# Altium PCB Pendulum_Project.PcbDoc
Units mil, origin at the board's own origin, x right, y up, seen from the top; angles counter-clockwise.
Board outline 3175 x 2933.07 mil, 2 copper layers (Top Layer, Bottom Layer); 34 components, 47 nets, 187 pads, 17 vias.
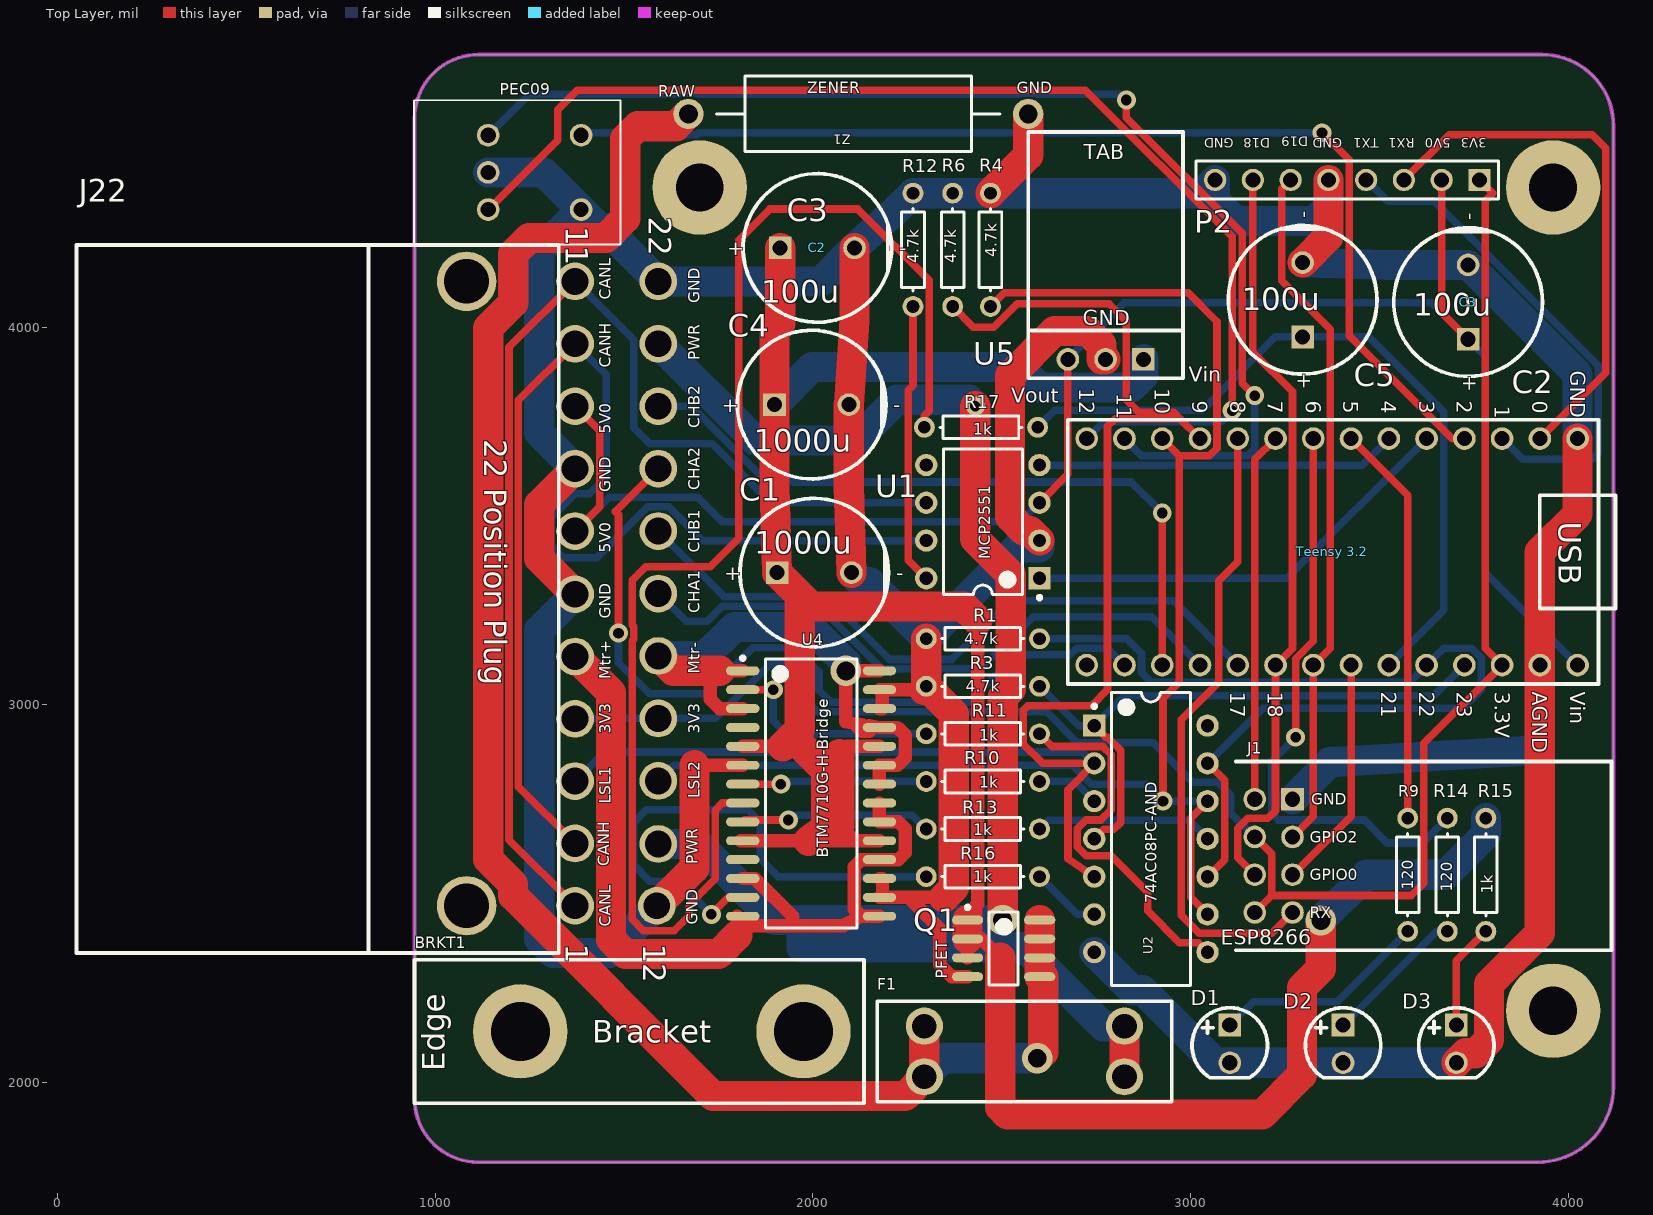
[diagram p0: Top Layer view]
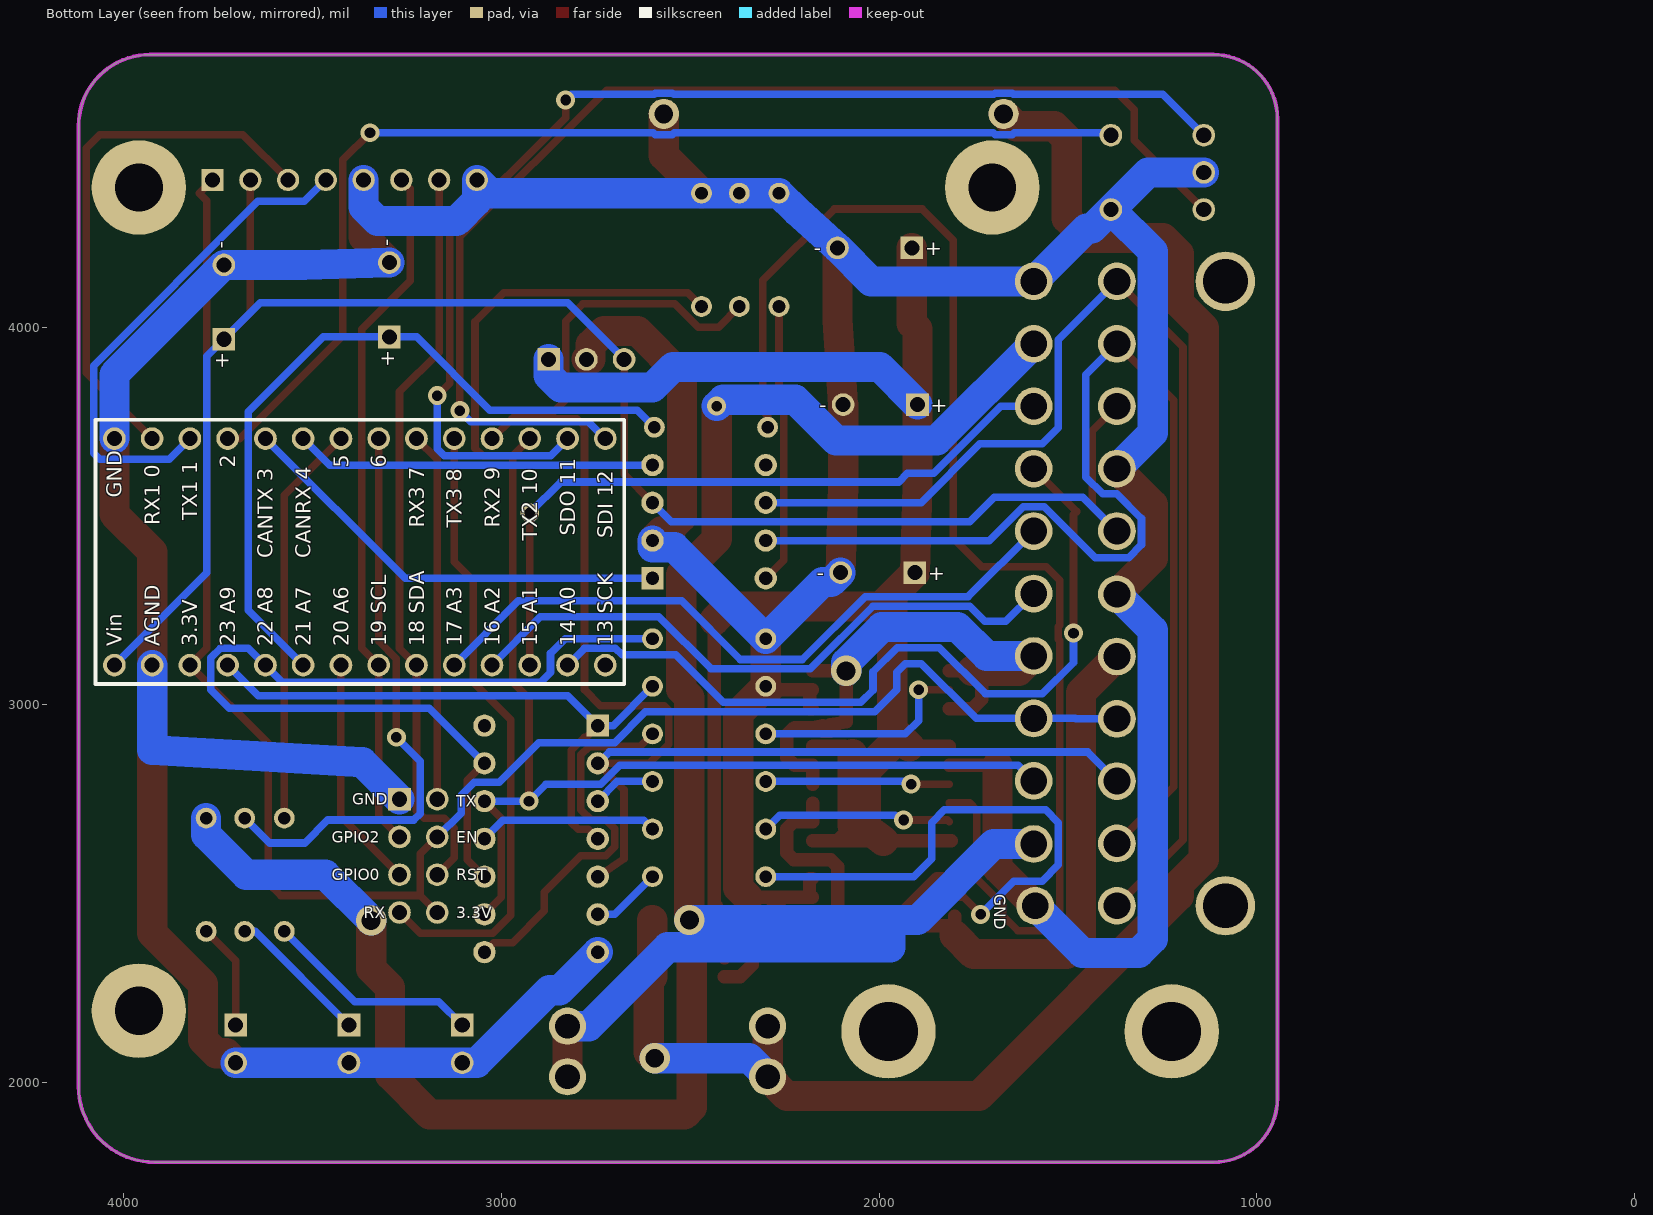
[diagram p1: Bottom Layer view, seen from below]

## Layer stack, top to bottom
Top Solder: solder mask 0.4, Solder Resist, Dk 3.5
Top Layer: signal copper 1.4
Dielectric 1: dielectric 12.6, FR-4, Dk 4.8
Bottom Layer: signal copper 1.4
Bottom Solder: solder mask 0.4, Solder Resist, Dk 3.5

## Board outline
1113.25,1788.78 cw(c1113.25,1957.03) 945,1957.03 945,4552.57 cw(c1114.28,4552.57) 1114.28,4721.85 3931.08,4721.85 cw(c3931.08,4532.93) 4120,4532.93 4120,1989.28 cw(c3919.5,1989.28) 3919.5,1788.78

## Design rules (kind name [scope] priority, off if disabled: settings)
Clearance [All] p1: gap=5
PolygonConnect [All] p1: connectstyle=Relief reliefconductorwidth=10 reliefentries=4 polygonreliefangle="90 Angle" airgapwidth=10
RoutingVias RAW_1 [InNet('RAW') OR InNet('RAW1') OR InNet('VCC24') OR InNet('VCC24') OR InNet('VCC24') OR InNet('MotorPos')  OR InNet('MotorNeg') OR InNet('GND')] p1: holewidth=50 width=80 viastyle="Through Hole" minholewidth=50 minwidth=80 maxholewidth=50 maxwidth=80
RoutingVias [All] p2: holewidth=28 width=50 viastyle="Through Hole" minholewidth=28 minwidth=50 maxholewidth=28 maxwidth=50
SMDNeckDown [All] p1: percent=150.000
SolderMaskExpansion [All] p1: expansion=4
Width RAW [InNet('RAW') OR InNet('VCC24') OR InNet('VCC24') OR InNet('VCC24') OR InNet('MotorPos')  OR InNet('MotorNeg')  OR InNet('GND') OR   InNet('RAW1')] p1: maxlimit=100 minlimit=10 preferedwidth=80 bottomlayer_minwidth=50 minimp=50.000000 maximp=50.000000 favimp=50.000000
Width [All] p2: maxlimit=30 minlimit=10 preferedwidth=20 minimp=50.000000 maximp=50.000000 favimp=50.000000
30 further rules are at their usual default settings.

## Classes and differential pairs
component class Pendulum_Project: D1 D2 J1 J22 P2 PEC09 R9 R12 R14 "Teensy 3.2" U1
component class HBridge_and_Power: BRKT1 C1 C2 C3 C4 C5 D3 F1 Q1 R1 R3 R4 R6 R10 R11 R13 R15 R16 R17 U2 U4 U5 Z1

## Components (designator, comment, footprint, x,y, rotation, side; value= is the part's Value field where it differs from the comment)
BRKT1 "Bracket" "Board Bracket" 1225,2135 r0 top
C1 "Cap Pol1" "Elec. Cap 5 x 10mm" 1905,3350 r0 top
C2 "Cap Pol1" "Elec. Cap 5 x 10mm" 1913.15,4210 r0 top
C3 "Cap Pol1" "Elec. Cap 5 x 10mm" 3735,3968.15 r90 top
C4 "Cap Pol1" "Elec. Cap 5 x 10mm" 1898.15,3795 r0 top
C5 "Cap Pol1" "Elec. Cap 5 x 10mm" 3296.85,3974.15 r90 top
D1 "LED1" "5mm Rad LED" 3105,2100 r0 top
D2 "LED1" "5mm Rad LED" 3405,2100 r0 top
D3 "LED1" "5mm Rad LED" 3705,2100 r0 top
F1 "Blade Fuse Holder" "Fuse Holder" 2825,2149 r180 top
J1 "ESP8266" ESP8266 3170,2750 r0 top
J22 "22 Pos Mini-Fit Jr." "22 pos Mini-Fit Jr. R/A Header" 1370,2467.87 r270 top
P2 "Header 8" HDR1X8 3765,4390 r180 top
PEC09 "PEC09 Quadrature Encoder" "PEC09 Series Encoder" 1140,4410 r180 top (schematic designator SW1)
Q1 "IRF9328" SOIC-8 2505,2355 r0 top
R1 "Res1" AXIAL-0.3 2450,3175 r180 top
R3 "Res1" AXIAL-0.3 2450,3049 r180 top
R4 "Res1" AXIAL-0.3 2470,4205 r270 top
R6 "Res1" AXIAL-0.3 2370,4205 r270 top
R9 "Res1" AXIAL-0.3 3575,2550 r90 top
R10 "Res1" AXIAL-0.3 2450,2797 r0 top
R11 "Res1" AXIAL-0.3 2450,2923 r0 top
R12 "120" AXIAL-0.3 2265,4205 r90 top
R13 "Res1" AXIAL-0.3 2450,2671 r180 top
R14 "Res1" AXIAL-0.3 3680,2550 r90 top
R15 "Res1" AXIAL-0.3 3782.08,2550 r90 top
R16 "Res1" AXIAL-0.3 2450,2545 r0 top
R17 "Res1" AXIAL-0.3 2445,3735 r0 top
"Teensy 3.2" "Teensy 3.2 Outside" "Teensy 3.2 Outside Only" 2725,3705 r270 top
U1 "MCP2551-I/P" PDIP300-P8 2450,3485 r180 top
U2 "74AC08PC" N14A 2895,2645 r0 top
U4 "BTM7710G" INF-PG-DSO-28-22_N 1995,2765 r0 top
U5 "OKI-78SR" OKI-78SR 2675,3915 r0 top
Z1 "SMA6J" AXIAL-0.9 2120,4565 r180 top

## Footprints (in the part's own frame and the unit in brackets; to place one, negate y for a bottom-side part, rotate by r counter-clockwise, add the part's x,y. Pads: shape width x height; smd on the part's side, far side on the other; paste and mask are expansions set on the pad)
"5mm Rad LED" [mil]
  rect 60x60 hole 40: 1(-1.11,52.06)
  round 60 hole 40: 2(-1.11,-47.94)
  silkscreen extent -101,-88 99,98
"22 pos Mini-Fit Jr. R/A Header" [mm] "Molex 22 position Mini-Fit Jr. Right Angle Header with Pegs, Series 5569"
  round 4 hole 3: 0(-42,-7.3) 0(0,-7.3)
  round 2.54 hole 1.803: 1(0,0) 2(-4.191,0) 3(-8.382,0) 4(-12.573,0) 5(-16.764,0) 6(-20.955,0) 7(-25.2,0) 8(-29.4,0) 9(-33.6,0) 10(-37.8,0) 11(-42,0) 12(0,5.5) 13(-4.155,5.6) 14(-8.4,5.6) 15(-12.6,5.6) 16(-16.8,5.6) 17(-21,5.6) 18(-25.2,5.6) 19(-29.4,5.6) 20(-33.6,5.6) 21(-37.8,5.6) 22(-42,5.6)
  silkscreen extent -44.45,-33.53 3.18,-1.1
AXIAL-0.3 [mm] "Axial Device, Thru-Hole; 2 Leads; 0.3 in Pin Spacing"
  round 1.4 hole 0.85: 1(-3.81,0) 2(3.81,0)
  silkscreen extent -2.77,-0.76 2.77,0.76
AXIAL-0.9 [mil] "Axial Device, Thru-Hole; 2 Leads; 0.9 in Pin Spacing"
  round 80 hole 50: 1(-450,0) 2(450,0)
  silkscreen extent -375,-100 375,100
"Board Bracket" [mil] "Keystone Electronics part no. 1570"
  round 250 hole 156: 0(0,0) 0(750,0)
  silkscreen extent -280,-190 910,190
"Elec. Cap 5 x 10mm" [mil] "2 lead polarized Radial Capacitor with 5 mm lead spacing and 10 mm diameter can"
  rect 60x60 hole 40: 1(0,0)
  round 60 hole 40: 2(196.85,0)
  silkscreen extent -98,-197 295,197
ESP8266 [mil] "WiFi Module - ESP8266 Sparkfun"
  rect 60x60 hole 40: 1(100,0)
  round 60 hole 40: 2(0,0) 3(100,-100) 4(0,-100) 5(100,-200) 6(0,-200) 7(100,-300) 8(0,-300)
  silkscreen extent -50,-400 945,100
"Fuse Holder" [mil] "Keystone 3557-15"
  round 98.43 hole 65: 1(0,134) 1(0,0) 2(530,0) 2(530,134)
  silkscreen extent -125,-66 655,200
HDR1X8 [mm] "Connector; Header; 8 Position"
  rect 1.5x1.5 hole 1.016: 1(0,0)
  round 1.5 hole 1.016: 2(2.54,0) 3(5.08,0) 4(7.62,0) 5(10.16,0) 6(12.7,0) 7(15.24,0) 8(17.78,0)
  silkscreen extent -1.27,-1.27 19.05,1.27
INF-PG-DSO-28-22_N [mm] "SOP, 28-Leads, Body 17.9x7.5mm, Pitch 1.27mm, IPC Medium Density"
  oval 2.25x0.6 smd: 1(-4.6,8.255) 2(-4.6,6.985) 3(-4.6,5.715) 4(-4.6,4.445) 5(-4.6,3.175) 6(-4.6,1.905) 7(-4.6,0.635) 8(-4.6,-0.635) 9(-4.6,-1.905) 10(-4.6,-3.175) 11(-4.6,-4.445) 12(-4.6,-5.715) 13(-4.6,-6.985) 14(-4.6,-8.255) 15(4.6,-8.255) 16(4.6,-6.985) 17(4.6,-5.715) 18(4.6,-4.445) 19(4.6,-3.175) 20(4.6,-1.905) 21(4.6,-0.635) 22(4.6,0.635) 23(4.6,1.905) 24(4.6,3.175) 25(4.6,4.445) 26(4.6,5.715) 27(4.6,6.985) 28(4.6,8.255)
  silkscreen extent -4.72,-9.05 3.08,9.23, body extent -3.8,-9.05 3.8,9.05, height 2.65
N14A [mm] "DIP, 14-Leads, Row Spacing 7.62mm, Pitch 2.54mm, Body 19.18x6.35mm"
  rect 1.5x1.5 hole 0.9: 1(-3.81,7.62)
  round 1.5 hole 0.9: 2(-3.81,5.08) 3(-3.81,2.54) 4(-3.81,0) 5(-3.81,-2.54) 6(-3.81,-5.08) 7(-3.81,-7.62) 8(3.81,-7.62) 9(3.81,-5.08) 10(3.81,-2.54) 11(3.81,0) 12(3.81,2.54) 13(3.81,5.08) 14(3.81,7.62)
  silkscreen extent -3.93,-9.85 2.65,9.85, body extent -3.55,-9.85 3.55,9.85, height 5.08
OKI-78SR [mil] "Horizontal Mount SIP DC/DC Converter"
  rect 60x60 hole 40: 1(200,0)
  round 60 hole 40: 2(100,0) 3(0,0)
  silkscreen extent -105,-50 305,602
PDIP300-P8 [mm] "DIP, 8-Leads, Row Spacing 7.62mm, Pitch 2.54mm, Body 9.5x6.6mm"
  rect 1.5x1.5 hole 0.9: 1(-3.81,3.81)
  round 1.5 hole 0.9: 2(-3.81,1.27) 3(-3.81,-1.27) 4(-3.81,-3.81) 5(3.81,-3.81) 6(3.81,-1.27) 7(3.81,1.27) 8(3.81,3.81)
  silkscreen extent -3.94,-4.9 2.65,5.23, body extent -3.55,-4.9 3.55,4.9, height 4.32
"PEC09 Series Encoder" [mil] "PEC09 Series - 9 mm Incremental Encoder"
  round 60 hole 40: A(0,-98.43) B(0,98.43) C(0,0) D(-246.06,-98.43) E(-246.06,98.43)
  silkscreen extent -350,-191 197,191
SOIC-8 [mm]
  oval 2.1x0.6 smd: 1(-2.425,1.905) 2(-2.425,0.635) 3(-2.425,-0.635) 4(-2.425,-1.905) 5(2.425,-1.905) 6(2.425,-0.635) 7(2.425,0.635) 8(2.425,1.905)
  silkscreen extent -2.55,-2.45 0.98,2.88
"Teensy 3.2 Outside Only" [mil] "32 bit Arduino Compatible Microcontroller www.pjrc.com/teensy"
  round 60 hole 40: 1(0,0) 2(0,100) 3(0,200) 4(0,300) 5(0,400) 6(0,500) 7(0,600) 8(0,700) 9(0,800) 10(0,900) 11(0,1000) 12(0,1100) 13(0,1200) 14(0,1300) 20(600,0) 21(600,100) 22(600,200) 23(600,300) 24(600,400) 25(600,500) 26(600,600) 27(600,700) 28(600,800) 29(600,900) 30(600,1000) 31(600,1100) 32(600,1200) 33(600,1300)
  silkscreen extent -50,-50 650,1400

## Part data
BRKT1: "Board Bracket"
C1 C2 C3 C4 C5: "Polarized Capacitor (Radial)"
D1 D2 D3: "Typical RED GaAs LED"
F1: library part "Fuse - Auto", "PC Auto-Fuse Holder"
J1: "Sparkfun ESP8266 Module (WRL-13678)"
J22: library part "22 Pos Header"
P2: "Header, 8-Pin"
PEC09: library part "Quadrature PEC09", "ENCODER INCREMENTAL W/SWITCH 9MM"
Q1: library part "IRF9328 P-FET", "MOSFET P-CH 30V 12A 8-SOIC"
R1 R3 R4 R6 R9 R10 R11 R13 R14 R15 R16 R17: "Resistor"
R12: library part Res1, "Resistor"
"Teensy 3.2": "32 Bit Arduino-Compatible Microcontroller"
U1: "High-Speed CAN Transceiver, 8-Pin PDIP, Industrial Temperature"
U2: "Quad 2-Input AND Gate, 14-Pin PDIP, Commercial Grade"
U4: "TrilithIC, 4.5 to 42 V, -40 to 150 degC, PG-DSO-28-22, Reel, Green"
U5: library part 7805, "5V DC/DC Converter (7805 replacement)"
Z1: library part "Zener - Bidirectional", "TVS DIODE 15VWM 24.4VC SMA"

## Free pads (board coordinates)
  round 250 hole 126: 1(1700,4370)
  round 250 hole 128: 1(3960,2190) 1(3960,4370)

## Via types
v1: diameter 50, hole 28, Top Layer to Bottom Layer, 13 vias
v2: diameter 80, hole 50, Top Layer to Bottom Layer, 4 vias

## Nets (pads, with @x,y where several pads share a name; then routed paths per layer and width w, separated by ;. In a path a pad name is that pad's centre, name@x,y a point inside that pad or via, vN(x,y) a via of type N, cw(c..) or ccw(c..) an arc to the next point about the centre after c; other vN are vias at no path point)
3V3: "Teensy 3.2.31" J1.4 J1.8 J22.4 J22.15 P2.1 | length 4748.5
  Top Layer w20: J1.8 3215,2495 ; J1.4 3215,2605 3215,2495 ; P2.1 3800,4355 3780,4335 3780,3150 3825,3105 3618,2898 3618,2528 3585,2495 3215,2495
  Bottom Layer w20: J22.4 1479,2962.87 1480.06,2963.94 J22.15 1742.94,2963.94 1888,3109 1930,3109 1952.56,3086.44 1952.56,3040 2011.12,2981.44 2618.56,2981.44 2700,2900 2901,2900 3006,2795 3072,2795 3107,2760 3107,2713 J1.4
5V0: "Teensy 3.2.33" C3.1 J22.7 J22.9 P2.2 U1.3 U5.3 | length 4706.9
  Top Layer w20: J22.7 1435,3525 1435,3725.71 J22.9 ; U1.3 2675,3610 U5.3 ; P2.2 3665,4038.15 C3.1
  Bottom Layer w20: J22.7 1460,3550 1695,3550 1760,3485 2550,3485 U1.3 ; U5.3 2825,4065 3638.15,4065 C3.1 3780,3923.15 3780,3350 4025,3105
A: "Teensy 3.2.2" PEC09.A | length 3182.1
  Top Layer w20: v1(2830.24,4601.76) 2830.24,4555.24 3137,4248.47 3137,3852 v1(3170,3819)
  Bottom Layer w20: PEC09.A 1248.57,4617 1644.22,4617 1647.22,4620 1692.78,4620 1695.78,4617 2544.22,4617 2547.22,4620 2592.78,4620 2595.78,4617 2815,4617 v1(2830.24,4601.76) ; 2825,3705 2870,3660 3152,3660 3170,3678 v1(3170,3819)
B: "Teensy 3.2.1" PEC09.B | length 3185
  Top Layer w20: PEC09.B 1324,4495.57 1324,4576 1376,4628 2721,4628 3110,4239 v1(3110,3779)
  Bottom Layer w20: 2725,3705 2770,3750 3081,3750 v1(3110,3779)
BUTTON: "Teensy 3.2.11" PEC09.D | length 2957.8
  Top Layer w20: v1(3348,4515) 3420,4443 3420,3978 3693,3705 3725,3705
  Bottom Layer w20: PEC09.D 1392.64,4515 1642.22,4515 1647.22,4510 1692.78,4510 1697.78,4515 2542.22,4515 2547.22,4510 2592.78,4510 2597.78,4515 v1(3348,4515)
CANH1: J22.2 J22.10 U1.7 | length 3198.9
  Top Layer w20: J22.2 1220,2782.87 1220,3806.06 J22.10
  Bottom Layer w20: J22.10 1452,3874.06 1452,3602.39 1408,3558.39 1370,3558.39 1305,3493.39 1305,3424 1339,3390 1428,3390 1563,3525 1618,3525 1708,3435 U1.7
CANL1: J22.1 J22.11 U1.6 | length 3107.6
  Top Layer w20: J22.1 1195,2642.87 1195,3946.42 J22.11
  Bottom Layer w20: J22.11 1525,3966.42 1525,3734 1568,3691 1732.71,3691 1888.71,3535 U1.6
CANRX: "Teensy 3.2.9" U1.4 | length 954
  Bottom Layer w20: U1.4 3455,3635 3525,3705
CANTX: "Teensy 3.2.10" U1.1 | length 1178.3
  Bottom Layer w20: U1.1 3255,3335 3625,3705
CHAANGLE: "Teensy 3.2.23" J22.17 | length 1660.5
  Bottom Layer w20: J22.17 1664.12,3221 1720,3221 1760,3261 2016,3261 2182,3095 2445,3095 2583,3233 2897,3233 3025,3105
CHAPOS: "Teensy 3.2.21" J22.19 | length 2155
  Top Layer w20: v1(1485,3190) 1485,3503.88 1477,3511.88 J22.19
  Bottom Layer w20: v1(1485,3190) 1485,3112 1568,3029 1718,3029 1840,3151 1952,3151 2016,3087 2016,3038.44 2048,3006.44 2412.44,3006.44 2538,3132 2680,3132 2698,3150 2780,3150 2825,3105
CHBANGLE: "Teensy 3.2.24" J22.18 | length 1810
  Bottom Layer w20: J22.18 1764.47,3286 2037,3286 2203,3120 2367,3120 2522,3275 2955,3275 3125,3105
CHBPOS: "Teensy 3.2.22" J22.20 | length 1854.6
  Top Layer w20: 2925,3105 v1(2925,3508)
  Bottom Layer w20: J22.20 1678.04,3790.71 1855.75,3613 1925,3613 1948,3590 2843,3590 v1(2925,3508)
GND: "Teensy 3.2.14" "Teensy 3.2.32" C1.2 C2.2 C3.2 C4.2 C5.2 D1.2 D2.2 D3.2 J1.1 J22.6 J22.8 J22.12 J22.22 P2.5 P2.8 PEC09.C PEC09.E Q1.4 R1.2 R3.2 R4.1 R6.1 R12.2 U1.2 U2.7 U4.6 U4.16 U4.17 U4.26 U4.27 U5.2 Z1.1 | length 14815.9
  Top Layer w35.43: 1686,2840 U4.6 ; U4.16 U4.16@2184.05,2490 ; U4.17 2184.05,2540 U4.16@2184.05,2490 ; U4.26 2183.15,2990 U4.27@2183.15,3040 ; U4.27 U4.27@2183.15,3040 ; R3.2@2293.7,3040 U4.27@2183.15,3040 ; 2347.62,2490 2252.98,2490 ; Q1.4 2368,2280 2336,2312 2336,2406.98 2252.98,2490 ; U4.16@2184.05,2490 2252.98,2490
  Top Layer w80: J22.6 1275,3387.87 1275,3530.35 J22.8 ; J22.12 1686,2567.34 1686,2840 ; C1.2 2095,3579.85 C4.2 2110,4018 C2.2 ; R3.2@2293.7,3040 R3.2 ; R1.2 R3.2 ; 2347.62,2490 2373,2515.38 2373,2976 R3.2 ; R4.1 2570,4455 Z1.1 ; U1.2 2575,3460 2560,3460 2522,3498 2522,3872 2640,3990 2728,3990 2764.09,3953.91 2764.09,3915 U5.2 ; C5.2 3365,4239.15 P2.5 ; D3.2 3728.83,2077 3755,2077 3790,2112 3790,2260.42 3925,2395.42 3925,3105 3925,3405 4025,3505 4025,3705
  Bottom Layer w80: PEC09.C 1287.64,4410 PEC09.E ; J22.6 1275,3197.87 1275,2380 1312,2343 1461.66,2343 J22.12 ; J22.8 1275,3720.35 1275,4200.51 PEC09.E ; C1.2 2126.85,3325 2150,3325 R1.2 2542,3417 2600,3417 U1.2 ; U2.7 2846,2244 2873,2244 3064.94,2052.06 D1.2 D2.2 D3.2 ; J1.1 3368,2848 3925,2880 3925,3105 ; C5.2 3522,4165 C3.2 4025,3875 4025,3705 ; P2.5 3365,4318 3328,4281 3119,4281 3065,4335 P2.8 3030,4355 R4.1 R6.1 R12.2 2217,4307 C2.2 2021.42,4121.42 J22.22 1450.25,4261.64 1436,4261.64 PEC09.E
LED1: "Teensy 3.2.8" R9.2 | length 1067.1
  Top Layer w20: 3425,3705 3575,3555 R9.2
LED2: "Teensy 3.2.7" R14.2 | length 1563.2
  Top Layer w20: v1(3278,2914) 3278,3122 3325,3169 3325,3705
  Bottom Layer w20: v1(3278,2914) 3215,2851 3215,2712 3232,2695 3460,2695 3521,2634 3614,2634 R14.2
LSL1: "Teensy 3.2.4" J22.3 R6.2 U2.2 U2.5 | length 4200.2
  Top Layer w20: R6.2 2425,4000 2479,4000 2541,4062 2784,4062 2830,4016 2830,3808 2863,3775 2955,3775 2972,3758 ; U2.5 2675.47,2592 2675.47,2775.47 U2.2 2608.44,2845 2557.44,2896 2557.44,2986 2569.44,2998 2738,2998 2780,3040 2780,3738 2800,3758 2972,3758 ; 3025,3705 2972,3758
  Bottom Layer w20: J22.3 1447.13,2875 2715,2875 U2.2
LSL2: "Teensy 3.2.3" J22.14 R4.2 U2.9 U2.12 | length 3934.4
  Top Layer w20: R4.2 2506,4091 2994,4091 3070,4015 3070,3680 3050,3660 2970,3660 ; 2925,3705 2970,3660 ; v1(2927,2745) 2927,3017 2970,3060 2970,3660 ; U2.9 3000,2490 3000,2700 U2.12
  Bottom Layer w20: J22.14 1631.89,2840 2687,2840 2737,2790 2882,2790 v1(2927,2745) U2.12
MotorNeg: J22.16 U4.1 U4.3 U4.22 U4.23 U4.25 U4.28 | length 1621
  Top Layer w35.43: U4.3 1753,2990 1728,3015 1728,3065 1753,3090 U4.1 ; v2(2087,3090) 2087,2954.61 2129.03,2947.72 2111.98,2947.72 2129.26,2930.43 2148.72,2930.43 2148.72,2944.49 U4.25 2224,2940 2244,2920 2244,2860 2224,2840 U4.23 2176,2840 2176,2790 U4.22 ; v2@2109,3090 U4.28
  Top Layer w80: J22.16 1629.76,3090 1753,3090
  Bottom Layer w80: J22.16 1715.29,3129.29 1792,3206 1993,3206 2087,3112 v2(2087,3090)
MotorPos: J22.5 U4.12 U4.14 U4.15 U4.18 U4.20 U4.21 | length 2244.6
  Top Layer w35.43: 1800,2390 1800,2415 ; U4.14@1800,2440 1800,2415 ; U4.12 1846,2540 1946,2440 ; U4.15 2128,2440 ; U4.21 2176,2740 2176,2690 U4.20 2226,2690 2244,2672 2244,2608 2226,2590 U4.18 2128,2590 2109,2571 2109,2459 2128,2440 ; 1800,2415 2080.06,2415 2128,2440
  Top Layer w80: J22.5 1465,3032.87 1465,2379 1504,2340 1750,2340 1800,2390
MSENSE: "Teensy 3.2.28" C5.1 R17.2 | length 1987.2
  Bottom Layer w20: R17.2 2640,3780 3030.65,3780 3224.8,3974.15 C5.1 3471.85,3974.15 3670,3776 3670,3250 3525,3105
NetD1_1: D1.1 R9.1 | length 573.8
  Bottom Layer w20: D1.1 3165.83,2214 3389,2214 R9.1
NetD2_1: D2.1 R14.1 | length 378.8
  Bottom Layer w20: D2.1 3651.83,2400 R14.1
NetD3_1: D3.1 R15.1 | length 280.3
  Top Layer w20: D3.1 3703.89,2321.81 R15.1
NetJ1_3: "Teensy 3.2.26" J1.3 P2.6 | length 1844.8
  Top Layer w20: P2.6 3241,4366 3241,4123 3370,3994 3370,3150 3325,3105 3325,2705 J1.3
NetJ1_5: "Teensy 3.2.27" J1.5 | length 619.2
  Top Layer w20: J1.5 3425,2705 3425,3105
NetJ1_6: "Teensy 3.2.25" J1.6 P2.7 | length 1993.2
  Top Layer w20: P2.7 3165,3934 3270,3829 3270,3150 3225,3105 3225,2720 3205,2700 3152,2700 3125,2673 3125,2595 J1.6
NetR10_1: R10.1 U4.7 | length 489
  Top Layer w20: U4.7 v1(1915,2790)
  Bottom Layer w20: v1(1915,2790) 1922,2797 R10.1
NetR10_2: R10.2 U2.3 | length 166.5
  Bottom Layer w20: R10.2 2693,2797 U2.3
NetR11_1: R11.1 U4.2 | length 582.6
  Top Layer w20: U4.2 v1(1895,3040)
  Bottom Layer w20: v1(1895,3040) 1895,2958 1930,2923 R11.1
NetR11_2: R11.2 U2.8 | length 1005.1
  Top Layer w20: R11.2 2633.47,2889.53 2768,2889.53 2789.53,2868 2789.53,2722.53 2762,2695 2723.47,2695 2700.47,2672 2700.47,2623.53 2724,2600 2790,2600 2886.28,2503.72 2886.28,2454.25 2970.53,2370 3020,2370 U2.8
NetR12_1: R12.1 U1.8 | length 745.3
  Top Layer w20: R12.1 2265,3846 2252,3833 2252,3383 U1.8
NetR13_1: R13.1 U2.11 | length 474.8
  Bottom Layer w20: R13.1 2623,2694 2996,2694 U2.11
NetR13_2: R13.2 U4.9 | length 508.9
  Top Layer w20: U4.9 1818.9,2695 v1(1935,2695)
  Bottom Layer w20: v1(1935,2695) 1944.3,2695 1957.28,2707.98 2263.02,2707.98 R13.2
NetR16_1: R16.1 U4.13 | length 1392.5
  Top Layer w20: v1(1731,2445) 1776,2490 U4.13
  Bottom Layer w20: v1(1731,2445) 1643.13,2532.87 1568,2532.87 1525,2575.87 1525,2688 1559,2722 1827,2722 1861,2688 1861,2592 1908,2545 R16.1
NetR16_2: R16.2 U2.6 | length 186.4
  Bottom Layer w20: R16.2 2700,2445 U2.6
NetR17_1: R17.1 U4.8 | length 3598.7
  Top Layer w20: U4.8 1760,2740 1741,2721 1741,2539 1672,2470 1672,2442 1632,2402 1551,2402 1521,2432 1521,3169.43 1525,3173.43 1525,3206.57 1521,3210.57 1521,3330 1557,3366 1728,3366 1803,3441 1803,4230 1886,4313 2119,4313 2308,4124 2308,3779 2295,3766 R17.1
PWM1: "Teensy 3.2.30" R3.1 U2.1 U2.4 | length 1610.1
  Top Layer w20: U2.4 2770,2670 2796.53,2670 2814.53,2688 2814.53,2880 2780,2914.53 2775.47,2914.53 U2.1
  Bottom Layer w20: R3.1 2704,2945 U2.1 2824,3024 3644,3024 3725,3105
PWM2: "Teensy 3.2.29" R1.1 U2.10 U2.13 | length 2522
  Top Layer w20: U2.10 3090,2590 3090,2800 U2.13
  Bottom Layer w20: R1.1 2831,3175 2870,3136 2870,3086 2896,3060 3580,3060 3625,3105 3670,3150 3744,3150 3770,3124 3770,3040 3721,2991 3191,2991 U2.13
RAW: F1.1 J22.13 J22.21 | length 4549.4
  Top Layer w80: v1(2430,3791) 2430,3439 2524,3345 2524,3041 2502.44,3019.44 v2(2502.44,2430) ; F1.1@2825,2015 F1.1@2825,2149
  Bottom Layer w80: J22.13 1696.35,2631.46 1897.81,2430 1969.81,2430 ; J22.21 1846.53,3700 2114,3700 2222,3808 2413,3808 v1(2430,3791) ; v2(2502.44,2430) 1969.81,2430 ; F1.1@2825,2149 2769,2149 2560,2358 1969.81,2358 1969.81,2430
RAW1: F1.2 Q1.5 Q1.6 Q1.7 Q1.8 Z1.2 | length 4661.1
  Top Layer w35.43: Q1.5 Q1.5@2610,2280
  Top Layer w80: Z1.2 1637,4532 1536,4532 1503,4499 1503,4288 1451,4236 1248,4236 1206.34,4194.34 1206.34,4064.34 1140,3998 1140,2591 1206,2525 1206,2494 1736,1964 2244,1964 2295,2015 F1.2@2295,2149 ; v2(2594,2064) 2610,2080 Q1.5@2610,2280 ; Q1.5 Q1.6 Q1.7 Q1.8
  Bottom Layer w80: F1.2@2295,2015 2344,2064 v2(2594,2064)
RX1: "Teensy 3.2.13" P2.3 | length 1441.1
  Top Layer w20: P2.3 3685,4510 4064,4510 4100,4474 4100,3880 3925,3705
RX3: "Teensy 3.2.6" J1.2 | length 977.8
  Top Layer w20: J1.2 3170,3650 3225,3705
TX1: "Teensy 3.2.12" P2.4 | length 1335.1
  Bottom Layer w20: P2.4 3522,4333 3644.78,4333 4080,3897.78 4080,3666 4064,3650 3880,3650 3825,3705
TX3: "Teensy 3.2.5" J1.7 | length 1661.8
  Top Layer w20: 3125,3705 3125,3379 3075,3329 3075,3060 2975,2960 2975,2443 3023,2395 3215,2395 J1.7
VCC: U2.14
VCC24: C1.1 C2.1 C4.1 Q1.1 Q1.2 Q1.3 R15.2 U4.5 U4.10 U4.19 U4.24 U5.1 | length 7426.3
  Top Layer w35.43: U4.10@1808.9,2640 U4.10 1989,2640 2111,2640 ; U4.5 1920,2890 1970,2890 ; 2070,2681 2111,2640 ; 2070,2869 2091,2890 U4.24 ; U4.19 2111,2640 ; Q1.3 2409,2330 2409,2380 Q1.2 2446,2380 2496,2330 ; Q1.1 2431,2430 2431,2468 2436,2473 2436,3224
  Top Layer w80: C2.1 1913.15,4010 1898.15,3995 C4.1 1898.15,3578.85 C1.1 1965,3290 ; 1920,2890 1965,2935 1965,3290 ; 1970,2890 2035,2825 2035,2675.05 1989,2640 ; 2070,2681 2070,2869 ; Q1.2 Q1.1 ; 2436,3224 2400,3260 1995,3260 1965,3290 ; 2496,2330 2496,1934 2515,1915 3190,1915 3295,2020 3295,2251 3345,2301 v2(3345,2429)
  Bottom Layer w80: C4.1 1998.15,3895 2545,3895 2600,3840 2843,3840 2875,3872 U5.1 ; v2(3345,2429) 3466,2550 3676.17,2550 3782.08,2655.92 R15.2
pads on no net: "Teensy 3.2.20" BRKT1.0 J22.0 U1.5 U4.4 U4.11

## Keep-outs
Keep-Out Layer:
  the board outline again, w10

## Silkscreen, mask and mechanical layers (free items; w line width, h text height)
Top Overlay:
  text "ZENER" at 1985,4620 h30
  text "GND" at 2540,4620 h30
  text "RAW" at 1590,4610 h30
  text "D19" at 3311.43,4505 h25 r180
  text "GND" at 3115,4500 h25 r180
  text "D18" at 3210.71,4500 h25 r180
  text "GND" at 3402.14,4500 h25 r180
  text "TX1" at 3497.86,4500 h25 r180
  text "RX1" at 3593.57,4500 h25 r180
  text "5V0" at 3689.29,4500 h25 r180
  text "3V3" at 3785,4500 h25 r180
  text "C3" at 1930,4280 h60
  text "4.7k" at 2487,4185 h30 r90
  text "4.7k" at 2280,4170 h30 r90
  text "4.7k" at 2380,4170 h30 r90
  text "CANL" at 1465,4072.87 h30 r90
  text "100u" at 1863.15,4065 h60
  text "GND" at 1700,4062.87 h30 r90
  text "100u" at 3135,4045 h60
  text "100u" at 3590,4030 h60
  text "PWR" at 1700,3912.87 h30 r90
  text "CANH" at 1465,3892.87 h30 r90
  text "C2" at 3850,3825 h60
  text "CHB2" at 1700,3732.87 h30 r90
  text "5V0" at 1465,3717.87 h30 r90
  text "1k" at 2425,3715 h30
  text "1000u" at 1843.15,3670 h60
  text "CHA2" at 1700,3567.87 h30 r90
  text "GND" at 1465,3562.87 h30 r90
  text "5V0" at 1465,3402.87 h30 r90
  text "CHB1" at 1700,3402.87 h30 r90
  text "1000u" at 1845,3400 h60
  text "MCP2551" at 2470,3385 h30 r90
  text "CHA1" at 1700,3242.87 h30 r90
  text "GND" at 1465,3227.87 h30 r90
  text "4.7k" at 2400,3160 h30
  text "Mtr-" at 1700,3082.87 h30 r90
  text "Mtr+" at 1465,3067.87 h30 r90
  text "4.7k" at 2405,3035 h30
  text "3V3" at 1465,2922.87 h30 r90
  text "3V3" at 1700,2922.87 h30 r90
  text "1k" at 2440,2905 h30
  text "1k" at 2440,2780 h30
  text "LSL2" at 1700,2752.87 h30 r90
  text "LSL1" at 1465,2737.87 h30 r90
  text "1k" at 2425,2655 h30
  text "BTM7710G-H-Bridge" at 2040,2595 h30 r90
  text "PWR" at 1695,2577.87 h30 r90
  text "CANH" at 1460,2572.87 h30 r90
  text "1k" at 2425,2530 h30
  text "120" at 3590,2510 h30 r90
  text "120" at 3692.5,2505 h30 r90
  text "1k" at 3800,2500 h30 r90
  text "74AC08PC-AND" at 2910,2475 h30 r90
  text "GND" at 1695,2417.87 h30 r90
  text "CANL" at 1465,2412.87 h30 r90
  text "PFET" at 2355,2275 h30 r90
Bottom Overlay:
  text "GND" at 1695,2497.87 h30 r90

## Dimensions
1114.28,4721.85 to 1113.25,1788.78 on Mechanical 1
1700,4370 to 3960,4370 on Mechanical 1

## Text inside footprints (layer, text, board x,y; h text height)
BRKT1: Top Overlay "Edge" at 1025,2030 h60 r90
C1: Top Overlay "+" at 1765,3330 h40; Top Overlay "-" at 2220,3330 h40; Bottom Overlay "-" at 2145,3330 h40; Bottom Overlay "+" at 1825,3330 h40
C2: Top Overlay "-" at 2228.15,4190 h40; Top Overlay "+" at 1773.15,4190 h40; Bottom Overlay "+" at 1833.15,4190 h40; Bottom Overlay "-" at 2153.15,4190 h40
C3: Top Overlay "-" at 3755,4283.15 h40 r90; Top Overlay "+" at 3755,3828.15 h40 r90; Bottom Overlay "+" at 3755,3888.15 h40 r90; Bottom Overlay "-" at 3755,4208.15 h40 r90
C4: Top Overlay "-" at 2213.15,3775 h40; Top Overlay "+" at 1758.15,3775 h40; Bottom Overlay "+" at 1818.15,3775 h40; Bottom Overlay "-" at 2138.15,3775 h40
C5: Top Overlay "-" at 3316.85,4289.15 h40 r90; Top Overlay "+" at 3316.85,3834.15 h40 r90; Bottom Overlay "+" at 3316.85,3894.15 h40 r90; Bottom Overlay "-" at 3316.85,4214.15 h40 r90
J1: Top Overlay "RX" at 3315,2435 h30; Top Overlay "GPIO0" at 3315,2535 h30; Top Overlay "GPIO2" at 3315,2635 h30; Top Overlay "GND" at 3320,2735 h30; Bottom Overlay "3.3V" at 3119.97,2435 h30; Bottom Overlay "RST" at 3119.97,2535 h30; Bottom Overlay "EN" at 3119.97,2635 h30; Bottom Overlay "TX" at 3119.97,2730 h30; Bottom Overlay "RX" at 3364.98,2435 h30; Bottom Overlay "GND" at 3394.97,2735 h30; Bottom Overlay "GPIO0" at 3449.96,2535 h30; Bottom Overlay "GPIO2" at 3449.96,2635 h30
J22: Top Overlay "22 Position Plug" at 1130,3702.87 h60 r270; Top Overlay "11" at 1345,4267.87 h60 r270; Top Overlay "22" at 1565,4292.87 h60 r270; Top Overlay "1" at 1345,2367.87 h60 r270; Top Overlay "12" at 1550,2367.87 h60 r270
PEC09: Mechanical 1 "Edge" at 870,4515 h60 r270
"Teensy 3.2": Top Overlay "Vin" at 4005,3035 h40 r270; Top Overlay "AGND" at 3905,3035 h40 r270; Top Overlay "3.3V" at 3805,3035 h40 r270; Top Overlay "23" at 3705,3035 h40 r270; Top Overlay "22" at 3605,3035 h40 r270; Top Overlay "21" at 3505,3035 h40 r270; Top Overlay "18" at 3205,3035 h40 r270; Top Overlay "17" at 3105,3035 h40 r270; Top Overlay "11" at 2805,3825.05 h40 r270; Top Overlay "12" at 2705,3838.37 h40 r270; Top Overlay "9" at 3005,3805.05 h40 r270; Top Overlay "10" at 2905,3838.37 h40 r270; Top Overlay "8" at 3105,3805.05 h40 r270; Top Overlay "7" at 3205,3805.05 h40 r270; Top Overlay "6" at 3305,3805.05 h40 r270; Top Overlay "5" at 3405,3805.05 h40 r270; Top Overlay "4" at 3505,3805.05 h40 r270; Top Overlay "3" at 3605,3805.05 h40 r270; Top Overlay "2" at 3705,3805.05 h40 r270; Top Overlay "1" at 3805,3791.72 h40 r270; Top Overlay "0" at 3905,3805.05 h40 r270; Top Overlay "GND" at 4005,3885.03 h40 r270; Top Overlay "USB" at 3975,3485 h60 r270; Bottom Overlay "CANTX 3" at 3605,3388.39 h40 r270; Bottom Overlay "CANRX 4" at 3505,3388.39 h40 r270; Bottom Overlay "GND" at 4005,3548.34 h40 r270; Bottom Overlay "RX1 0" at 3905,3475.03 h40 r270; Bottom Overlay "RX3 7" at 3205,3468.37 h40 r270; Bottom Overlay "TX3 8" at 3105,3468.37 h40 r270; Bottom Overlay "SDI 12" at 2705,3441.71 h40 r270; Bottom Overlay "SDO 11" at 2805,3448.37 h40 r270; Bottom Overlay "TX1 1" at 3805,3488.36 h40 r270; Bottom Overlay "RX2 9" at 3005,3468.37 h40 r270; Bottom Overlay "TX2 10" at 2905,3435.05 h40 r270; Bottom Overlay "2" at 3705,3628.32 h40 r270; Bottom Overlay "5" at 3405,3628.32 h40 r270; Bottom Overlay "6" at 3305,3628.32 h40 r270; Bottom Overlay "22 A8" at 3605,3155.07 h40 r270; Bottom Overlay "20 A6" at 3405,3155.07 h40 r270; Bottom Overlay "18 SDA" at 3205,3155.07 h40 r270; Bottom Overlay "13 SCK" at 2705,3155.07 h40 r270; Bottom Overlay "23 A9" at 3705,3155.07 h40 r270; Bottom Overlay "19 SCL" at 3305,3155.07 h40 r270; Bottom Overlay "16 A2" at 3005,3155.07 h40 r270; Bottom Overlay "Vin" at 4005,3155.07 h40 r270; Bottom Overlay "3.3V" at 3805,3155.07 h40 r270; Bottom Overlay "AGND" at 3905,3155.07 h40 r270; Bottom Overlay "21 A7" at 3505,3155.07 h40 r270; Bottom Overlay "17 A3" at 3105,3155.07 h40 r270; Bottom Overlay "14 A0" at 2805,3155.07 h40 r270; Bottom Overlay "15 A1" at 2905,3155.07 h40 r270
U5: Top Overlay "Vin" at 2995,3855 h40; Top Overlay "TAB" at 2717,4445 h40; Top Overlay "Vout" at 2525,3800 h40; Top Overlay "GND" at 2715,4005 h40